# Altium PCB STM32F4_OSD_V12.PcbDoc
Units mil, origin at the board's own origin, x right, y up, seen from the top; angles counter-clockwise.
Board outline 6000 x 4000 mil, 4 copper layers (Top Layer, Top power, Top GND, Bottom Layer), stack 30.634 mil thick; 61 components, 66 nets, 277 pads, 85 vias.
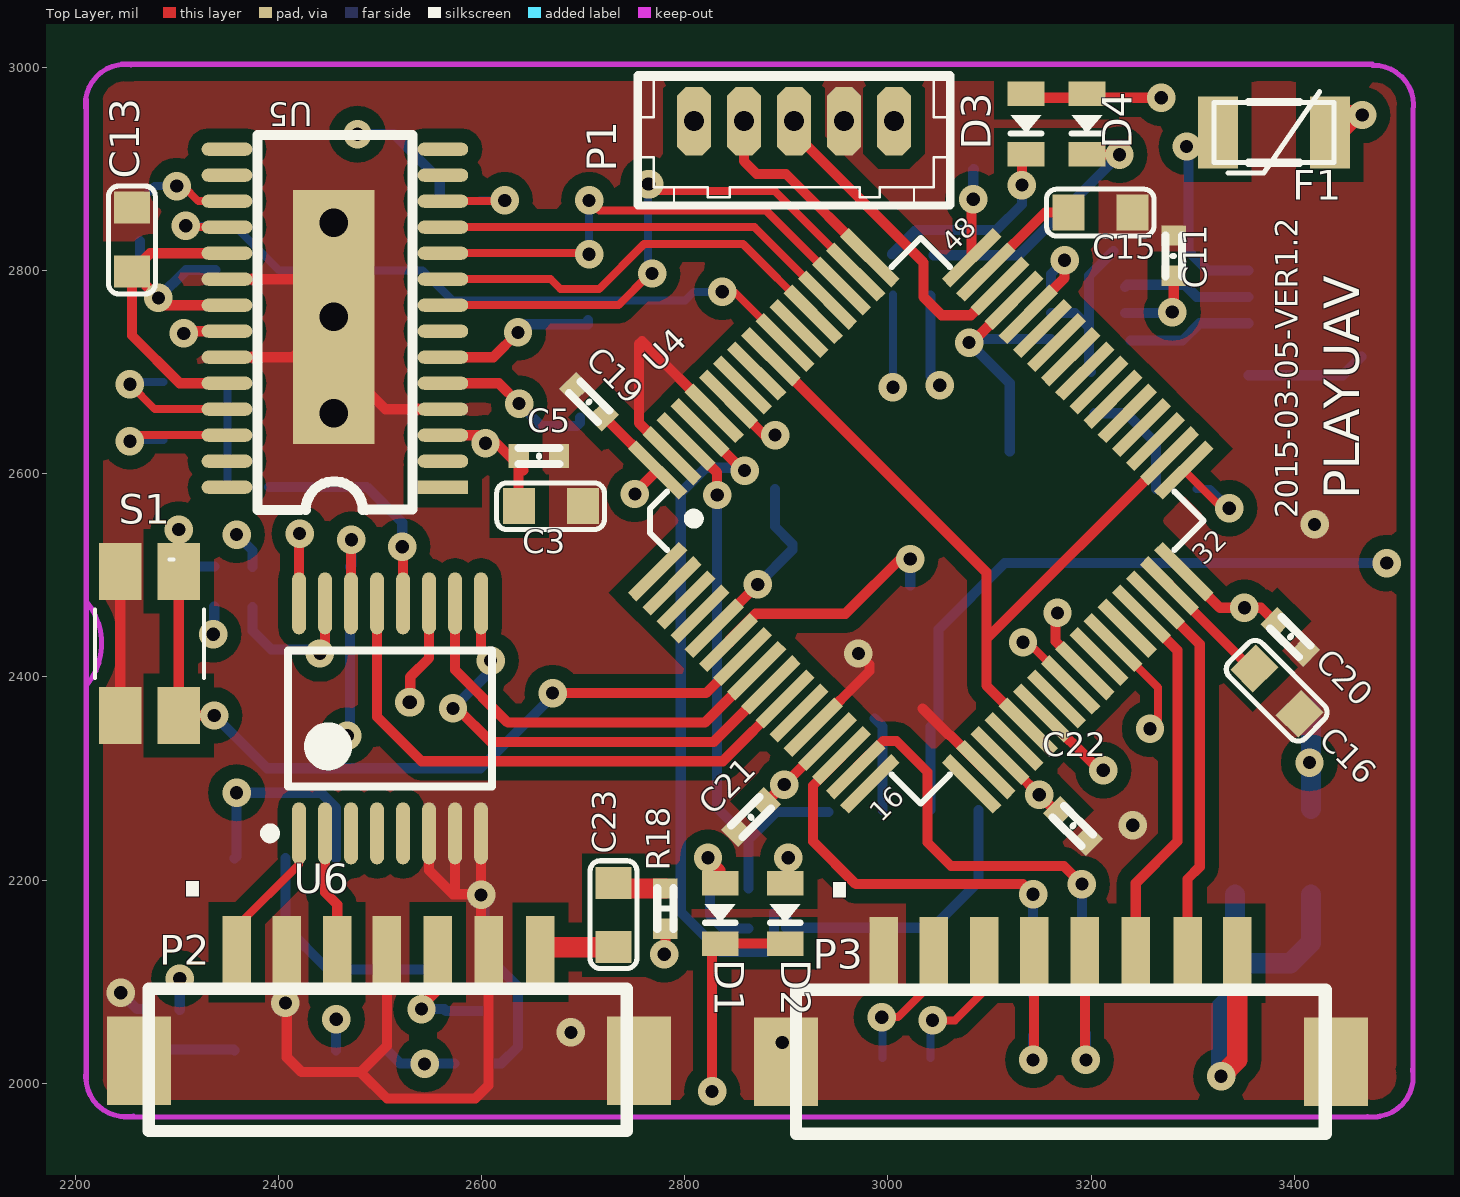
[diagram p0: Top Layer view]
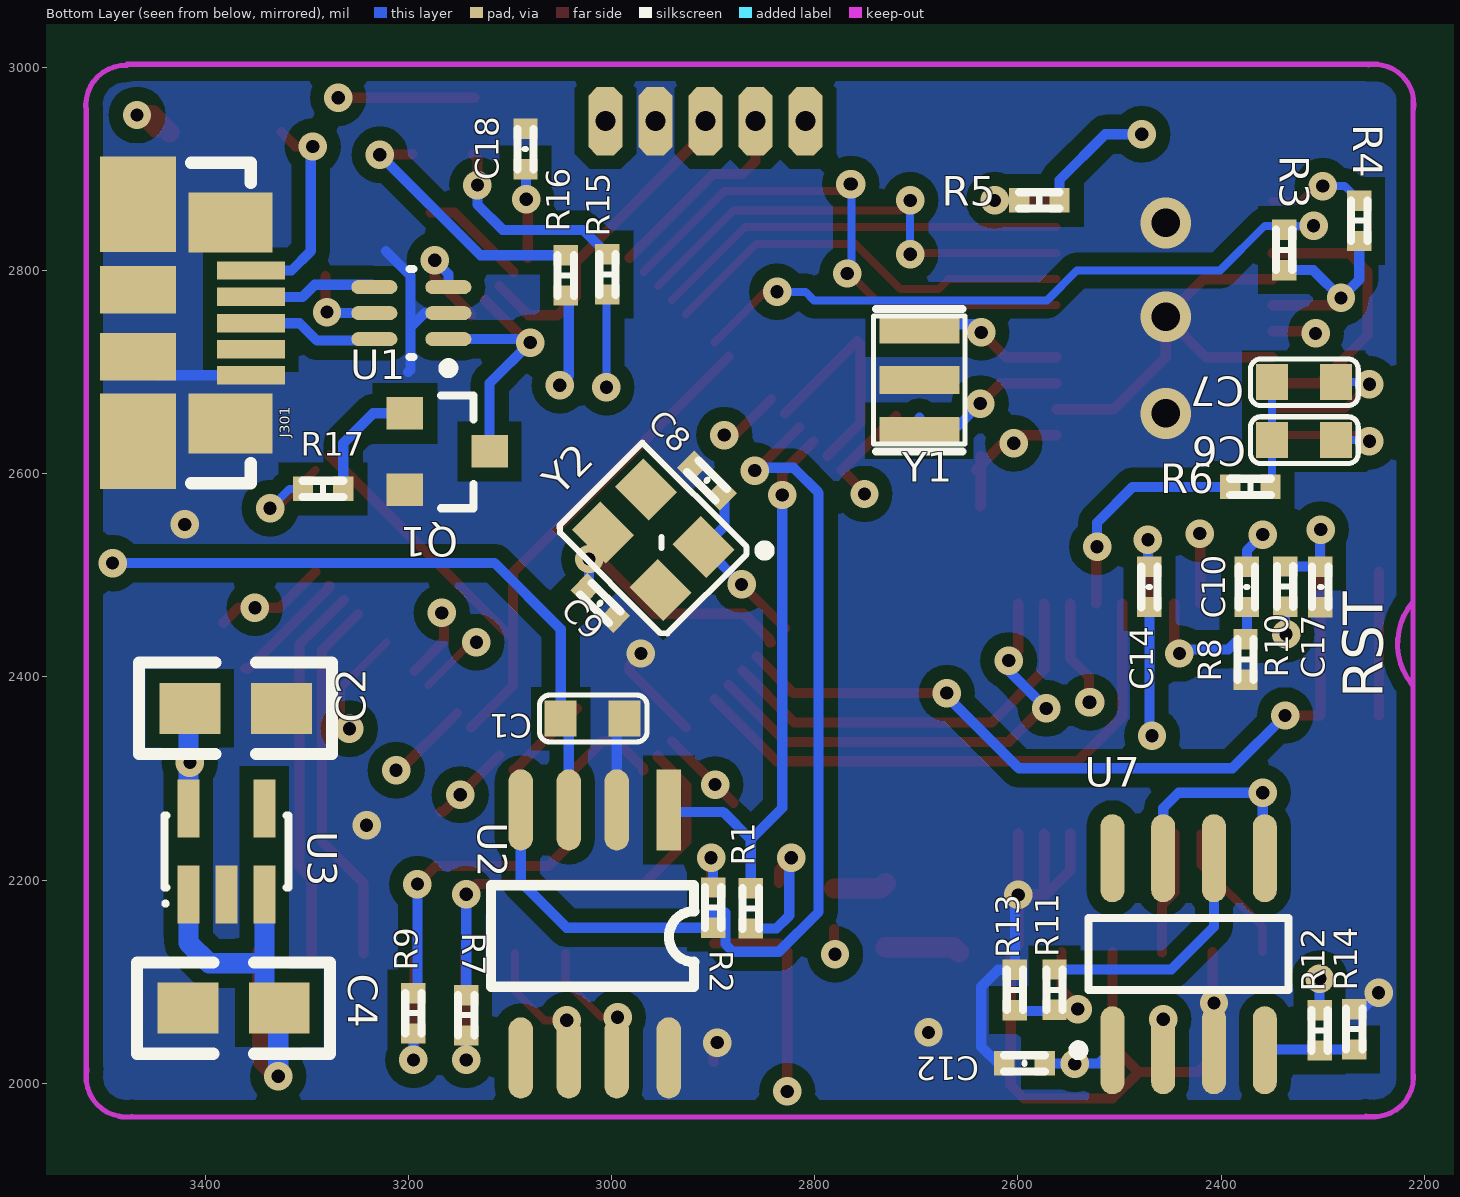
[diagram p1: Bottom Layer view, seen from below]
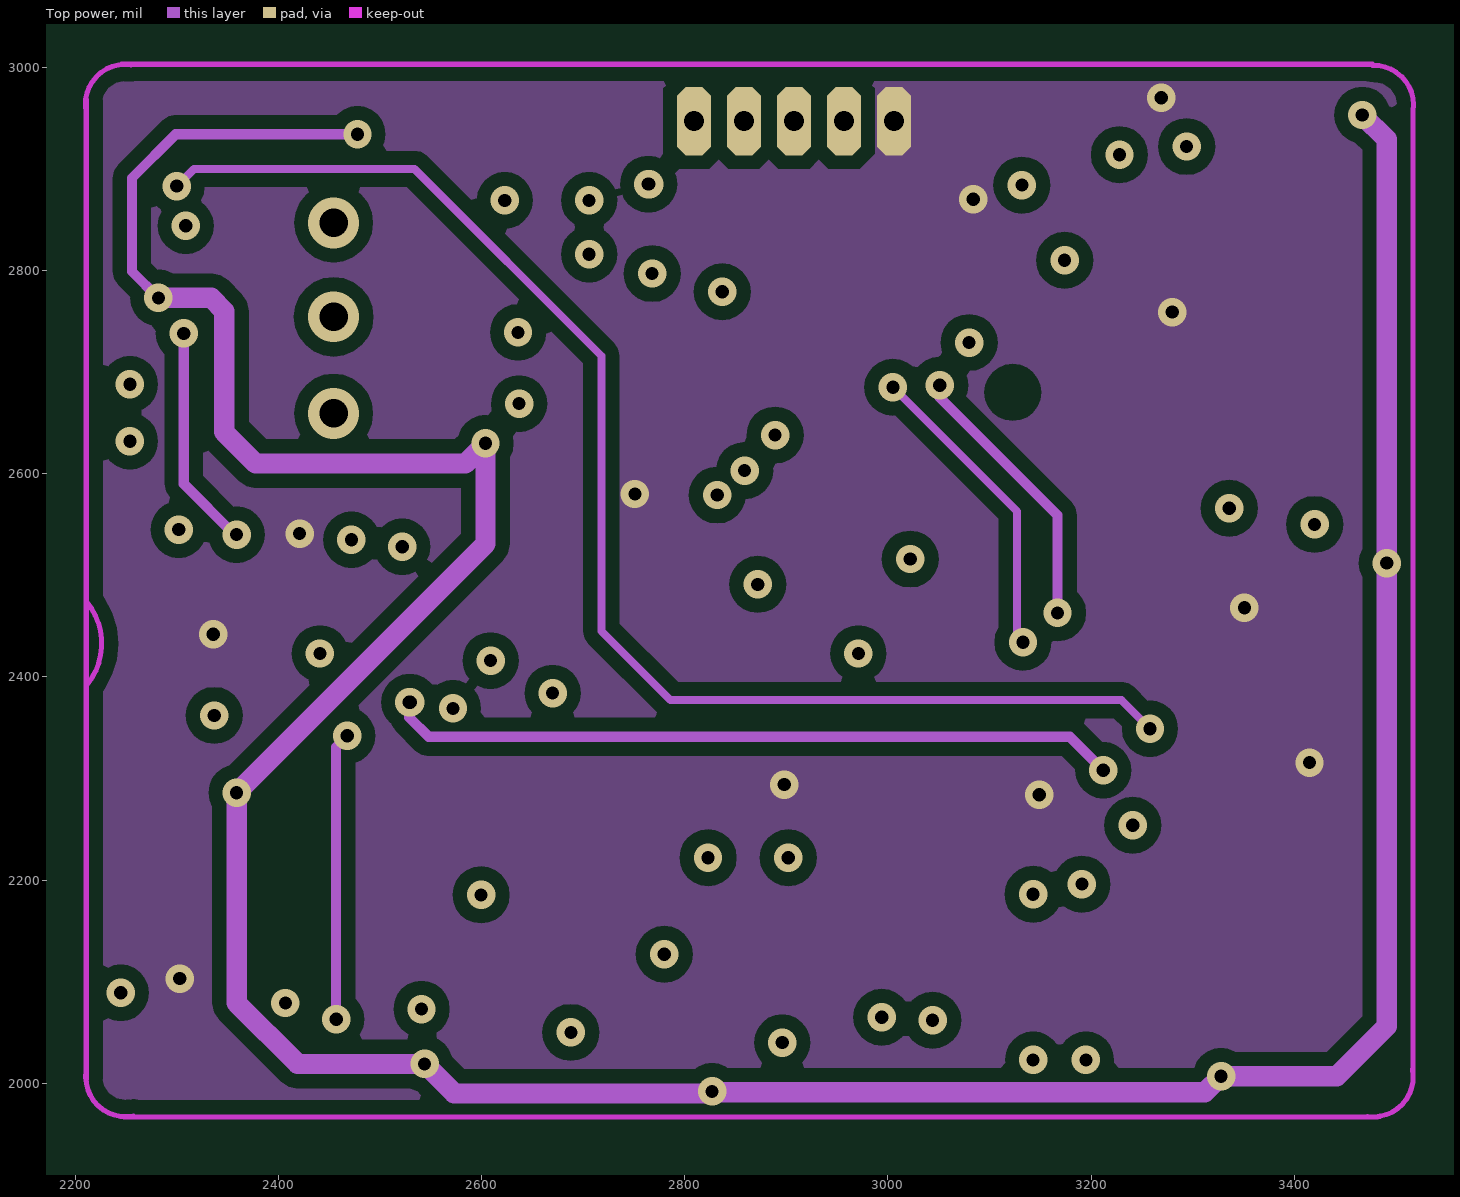
[diagram p2: Top power]
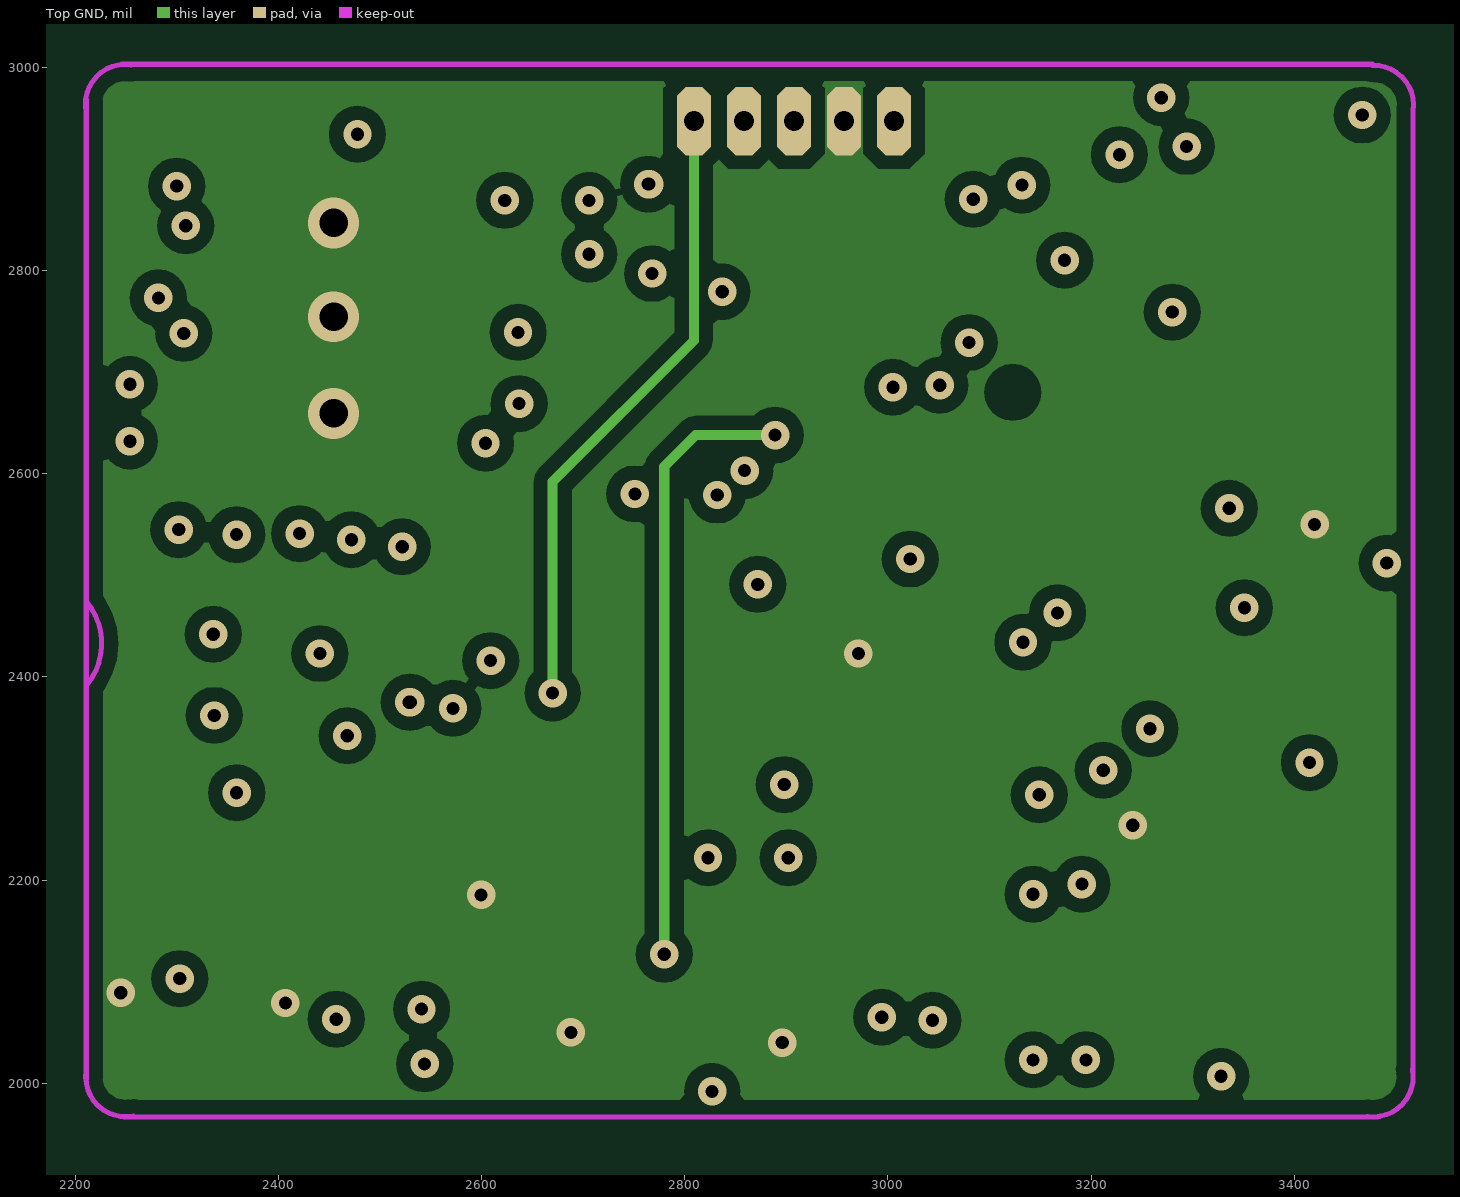
[diagram p3: Top GND]

## Layer stack, top to bottom
Top Solder: solder mask 0.4, Solder Resist, Dk 3.5
Top Layer: signal copper 1.4
Dielectric1: core 10, FR-4, Dk 4.2
Top power: signal copper 1.417
Dielectric 3: prepreg 5, Dk 4.2
Top GND: signal copper 1.417
Dielectric 2: core 10, Dk 4.2
Bottom Layer: signal copper 1.4
Bottom Solder: solder mask 0.4, Solder Resist, Dk 3.5

## Board outline
1000,1000 7000,1000 7000,5000 1000,5000

## Design rules (kind name [scope] priority, off if disabled: settings)
Clearance inpoly [(InPoly)] p1: gap=13.78
Clearance [All] p2: gap=7.87
ComponentClearance [All] p1: gap=0 collisioncheckmode=3 verticalgap=0 showdistances=FALSE
FabricationTestpoint [(IsPad And (OnTopLayer Or OnBottomLayer))] p1: side=3 testpointundercomponent=TRUE minsize=40 maxsize=100 preferedsize=60 minholesize=0 maxholesize=40 preferedholesize=32 testpointgrid=1 allowsidetop=TRUE allowsidebottom=TRUE usegrid=TRUE gridtolerance=0.01
PlaneConnect [All] p1: planeconnectstyle=Direct reliefexpansion=20 reliefentries=4 reliefconductorwidth=10 reliefairgap=10
PolygonConnect [All] p1: connectstyle=Direct reliefconductorwidth=10 reliefentries=4 polygonreliefangle="90 Angle" airgapwidth=10
RoutingVias [All] p1: holewidth=13 width=28 viastyle="Through Hole" minholewidth=13 minwidth=28 maxholewidth=13 maxwidth=28
SolderMaskExpansion [All] p1: expansion=4
Width [All] p1: maxlimit=78.74 minlimit=5.91 preferedwidth=10
27 further rules are at their usual default settings.

## Components (designator, comment, footprint, x,y, rotation, side; value= is the part's Value field where it differs from the comment)
C1 "104" 0603C 3017,2359 r180 bottom
C2 "10uf" 0805 3325,2369 r0 bottom
C3 "10uf" 0603C 2667,2568 r180 top
C4 "10uf" 0805 3417,2074 r180 bottom
C5 "Cap" 0402-CAP 2655,2619 r0 top
C6 "4.7uF" 0603C 2317,2633 r180 bottom
C7 "4.7uF" 0603C 2317,2690 r180 bottom
C8 "8pF" 0402-CAP 2906,2591 r45 bottom
C9 "8pF" 0402-CAP 3011,2475 r225 bottom
C10 "104" 0402-CAP 2373,2490 r270 bottom
C11 "Cap" 0402-CAP 3283,2816 r270 top
C12 "104" 0402-CAP 2592,2018 r0 bottom
C13 "1uf" 0603C 2256,2829 r270 top
C14 "104" 0402-CAP 2469,2490 r270 bottom
C15 "2.2uf" 0603C 3208,2857 r180 top
C16 "2.2uf" 0603C 3382,2387 r135 top
C17 "Cap" 0402-CAP 2304,2487 r90 bottom
C18 "104" 0402-CAP 3083,2921 r270 bottom
C19 "104" 0402-CAP 2706,2673 r315 top
C20 "104" 0402-CAP 3396,2437 r135 top
C21 "104" 0402-CAP 2863,2262 r45 top
C22 "104" 0402-CAP 3182,2251 r135 top
C23 "2.2uf" 0603C 2730,2167 r90 top
D1 "LED" 0603-LED 2835,2167 r90 top
D2 "LED" 0603-LED 2899,2167 r90 top
D3 "LED" 0603-LED 3136,2944 r90 top
D4 "LED" 0603-LED 3196,2944 r90 top
F1 "500MA" PTC-1206 3380,2936 r180 top
J301 "MICRO USB B" MOLEX-47346-0001 3466,2748 r180 bottom
P1 "JTAG" DF13-5P-1.25DSA 2907.58,2947 r180 top
P2 "DF13-7P-1.25DSA" DF13C-7P-1.25V 2593,2033 r0 top locked
P3 "DF13-8P-1.25DSA" DF13C-8P-1.25V 3210,2097 r0 top locked
Q1 "Comment" SOT23-3 3164,2622 r270 bottom
R1 "1K" 0402-RES 2863,2177 r90 bottom
R2 "1K" 0402-RES 2900,2168 r270 bottom
R3 "1K" 0402-RES 2338,2815.32 r270 bottom
R4 "1K" 0402-RES 2264,2844 r270 bottom
R5 "1K" 0402-RES 2574,2869 r180 bottom
R6 "75R" 0402-RES 2376,2587 r0 bottom
R7 "220R" 0402-RES 3143,2062 r270 bottom
R8 "75R" 0402-RES 2376,2422 r90 bottom
R9 "220R" 0402-RES 3195,2064 r270 bottom
R10 "10K" 0402-RES 2337,2484 r270 bottom
R11 "75R" 0402-RES 2564,2097 r90 bottom
R12 "3K" 0402-RES 2303,2057 r90 bottom
R13 "75R" 0402-RES 2603,2087 r270 bottom
R14 "1.5K" 0402-RES 2269,2048.32 r270 bottom
R15 "1K" 0402-RES 3004,2801 r90 bottom
R16 "1K" 0402-RES 3045,2800 r90 bottom
R17 "1K" 0402-RES 3279,2585 r180 bottom (schematic designator R15)
R18 "75R" 0402-RES 2781,2167 r270 top
S1 "TAC_SWITCHSMD" EVQP7J01K 2273,2433 r270 top
U1 "NUF2221W1T2" SOT363 3197,2758 r0 bottom
U2 "82C250T" SO-8N 2943.57,2249.32 r270 bottom
U3 "SPX3819-3.3V" SOT23-5 3378,2223 r180 bottom
U4 "STM32F405RG" LQFP64 2771.48,2501.32 r45 top
U5 "MAX7456EUI" SSOP-28 2562,2586.68 r180 top
U6 "ADG733" TSOP16 2420.46,2246 r180 top
U7 "MAX7452" SOIC-SN8_N 2432,2127 r90 bottom
Y1 "27MHZ" 27MHZ 2694.5,2694.5 r90 bottom
Y2 "8M" OSCILLATOR-3.2X2.5 2959,2535 r45 bottom

## Footprints (in the part's own frame and the unit in brackets; to place one, negate y for a bottom-side part, rotate by r counter-clockwise, add the part's x,y. Pads: shape width x height; smd on the part's side, far side on the other; paste and mask are expansions set on the pad)
27MHZ [mil]
  rect 27.56x78.74 smd: 1(-52.5,2.5) 2(47.5,2.5) 3(-2.5,2.5)
  silkscreen extent -73,-42 67,48
0402-CAP [mil] "0402-CAP"
  rect 20x24 smd: 1(-18.37,-1.6) 2(21.31,-1.6)
  silkscreen extent -18,-10 22,6
0402-RES [mil] "0402-RES"
  rect 20x24 smd: 1(-24.68,0) 2(15,0)
  silkscreen extent -25,-12 15,12
0603-LED [mil] "0603-LED"
  rect 24x36 smd: 1(30,0) 2(-29.53,0)
  silkscreen extent -9,-15 9,15
0603C [mm]
  rect 0.8x0.9 smd: 1(0.762,0) 2(-0.838,0)
  silkscreen extent -1.37,-0.58 1.32,0.58
0805 [mil]
  rect 60x50 smd: 1(0,0) 2(90,0)
  silkscreen extent -50,-45 140,45
DF13-5P-1.25DSA [mm]
  oct 0.856x1.711 hole 0.5: 1(-2.5,0) 2(-1.25,0) 3(0,0) 4(1.25,0) 5(2.5,0)
  silkscreen extent -3.97,-1.2 3.98,2.13
DF13C-7P-1.25V [mil]
  rect 28x71 smd: 1(-233.82,96) 2(-184.61,96) 3(-135,96) 4(-86,96) 5(-36,96) 6(14,96) 7(65,96)
  rect 63x87 smd: M$0(162,-10.87) M$1(-330.28,-10.87)
  silkscreen extent -320,-80 150,60
DF13C-8P-1.25V [mil]
  rect 28x71 smd: 1(-213.82,31) 2(-164.61,31) 3(-115,31) 4(-66,31) 5(-16,31) 6(34,31) 7(85,31) 8(134,31)
  rect 63x87 smd: M$0(231,-75.87) M$1(-310.28,-75.87)
  silkscreen extent -300,-147 221,-5
EVQP7J01K [mil] "EVQP7J01K"
  rect 56x42 smd: 1(-70.87,29) 2(71,29) 3(-70.87,-28.54) 4(71,-28.54)
  silkscreen extent -83,-53 34,54
LQFP64 [mm]
  rect 1.8x0.3 smd: 1(0.075,0.003) 2(0.075,-0.497) 3(0.075,-0.997) 4(0.075,-1.497) 5(0.075,-1.997) 6(0.075,-2.497) 7(0.075,-2.997) 8(0.075,-3.497) 9(0.075,-3.997) 10(0.075,-4.497) 11(0.075,-4.997) 12(0.075,-5.497) 13(0.075,-5.997) 14(0.075,-6.497) 15(0.075,-6.997) 16(0.075,-7.497) 33(11.175,-7.497) 34(11.175,-6.997) 35(11.175,-6.497) 36(11.175,-5.997) 37(11.175,-5.497) 38(11.175,-4.997) 39(11.175,-4.497) 40(11.175,-3.997) 41(11.175,-3.497) 42(11.175,-2.997) 43(11.175,-2.497) 44(11.175,-1.997) 45(11.175,-1.497) 46(11.175,-0.997) 47(11.175,-0.497) 48(11.175,0.003)
  rect 0.3x1.8 smd: 17(1.875,-9.297) 18(2.375,-9.297) 19(2.875,-9.297) 20(3.375,-9.297) 21(3.875,-9.297) 22(4.375,-9.297) 23(4.875,-9.297) 24(5.375,-9.297) 25(5.875,-9.297) 26(6.375,-9.297) 27(6.875,-9.297) 28(7.375,-9.297) 29(7.875,-9.297) 30(8.375,-9.297) 31(8.875,-9.297) 32(9.375,-9.297) 49(9.375,1.803) 50(8.875,1.803) 51(8.375,1.803) 52(7.875,1.803) 53(7.375,1.803) 54(6.875,1.803) 55(6.375,1.803) 56(5.875,1.803) 57(5.375,1.803) 58(4.875,1.803) 59(4.375,1.803) 60(3.875,1.803) 61(3.375,1.803) 62(2.875,1.803) 63(2.375,1.803) 64(1.875,1.803)
  silkscreen extent 0.63,-8.75 10.63,1.25
MOLEX-47346-0001 [mil] "MOLEX-47346-0001"
  rect 67x18 smd: D+(111,0) D-(111,26) GND(111,-51.18) ID(111,-25.59) VBUS(111,52)
  rect 75x94 smd: GND1(0,117) GND4(0,-116.14)
  rect 83x59 smd: GND2(91,99) GND3(91,-98.43)
  rect 75x47 smd: GND5(0,-32.97) GND6(0,33)
  silkscreen extent 52,-157 111,158
OSCILLATOR-3.2X2.5 [mil] "OSCILLATOR-3.2X2.5"
  rect 47.24x39.37 smd: 1(-40,-30) 2(40,30) 3(40,-30) 4(-40,30)
  silkscreen extent -89,-74 75,60
PTC-1206 [mm]
  rect 1x1.8 smd: 1(-1.4,0) 2(1.4,0)
  silkscreen extent -1.5,-1.02 1.5,1.02
SO-8N [mil]
  rect 80x24 smd: 1(-19.68,0)
  oval 80x24 smd: 2(-19.68,-51.18) 3(-19.68,-98.43) 4(-19.68,-145.67) 5(224.41,-145.67) 6(224.41,-98.43) 7(224.41,-51.18) 8(224.41,0)
  silkscreen extent 54,-175 154,25
SOIC-SN8_N [mm] "SOIC, 8-Leads, Body 4.9x3.8mm, Pitch 1.27mm, IPC Medium Density"
  oval 2.2x0.6 smd: 1(-2.4,1.905) 2(-2.4,0.635) 3(-2.4,-0.635) 4(-2.4,-1.905) 5(2.4,-1.905) 6(2.4,-0.635) 7(2.4,0.635) 8(2.4,1.905)
  silkscreen extent -2.52,-2.5 0.9,2.88, body extent -2,-2.5 2,2.5, height 1.75
SOT23-3 [mil] "SOT23-3"
  rect 32x36 smd: 1(-37.4,-39.37) 2(38,-39.37) 3(0,44)
  silkscreen extent -55,-4 56,28
SOT23-5 [mm]
  rect 0.55x1.45 smd: 1(-0.975,-0.948) 2(-0.025,-0.948) 3(0.925,-0.948) 4(0.925,1.202) 5(-0.975,1.202)
  silkscreen extent -1.6,-1.22 1.52,1.03
SOT363 [mm]
  oval 1.15x0.35 smd: 1(-0.925,0.65) 2(-0.925,0) 3(-0.925,-0.65) 4(0.925,-0.65) 5(0.925,0) 6(0.925,0.65)
  silkscreen extent -1.05,-1.1 0.05,1.5, body extent -0.7,-1.1 0.7,1.1, height 1.1
SSOP-28 [mm]
  rect 1.27x0.33 smd: 1(0,0)
  oval 1.27x0.33 smd: 2(0,-0.65) 3(0,-1.3) 4(0,-1.95) 5(0,-2.6) 6(0,-3.25) 7(0,-3.9) 8(0,-4.55) 9(0,-5.2) 10(0,-5.85) 11(0,-6.5) 12(0,-7.15) 13(0,-7.8) 14(0,-8.45) 15(5.398,-8.45) 16(5.397,-7.8) 17(5.397,-7.15) 18(5.397,-6.5) 19(5.397,-5.85) 20(5.397,-5.2) 21(5.397,-4.55) 22(5.397,-3.9) 23(5.397,-3.25) 24(5.397,-2.6) 25(5.397,-1.95) 26(5.397,-1.3) 27(5.397,-0.65) 28(5.397,0)
  rect 2.032x6.35 smd: 4(2.731,-4.259)
  silkscreen extent 0.76,-8.81 4.64,0.57
TSOP16 [mm]
  oval 0.35x1.55 smd: 1(0,0) 2(-0.65,0) 3(-1.3,0) 4(-1.95,0) 5(-2.6,0) 6(-3.25,0) 7(-3.9,0) 8(-4.55,0) 9(-4.55,-5.75) 10(-3.9,-5.75) 11(-3.25,-5.75) 12(-2.6,-5.75) 13(-1.95,-5.75) 14(-1.3,-5.75) 15(-0.65,-5.75) 16(0,-5.75)
  silkscreen extent -4.83,-4.58 0.85,0.12, body extent -4.83,-5.12 0.27,-0.63, height 1.2

## Part data
C1 C10: library part CAP, "Capacitor"
C2 C4: library part E
C3 C13 C15 C16 C23: library part "Cap Pol1", "Polarized Capacitor (Radial)"
C5 C11 C17: "Capacitor"
C6 C7: library part ELECTRO1, "Electrolytic Capacitor 1"
C8 C9: library part CAP0805, "Capacitor"
C12 C14 C18 C19 C20 C21 C22: library part Cap, "Capacitor"
F1 R1 R2: library part RES
J301: library part MOLEX-47346-0001
P1: library part "Header 5", "Header, 5-Pin"
P2: library part "Header 7", "Header, 7-Pin"
P3: library part "Header 8", "Header, 8-Pin"
R3 R4 R5 R6 R7 R8 R9 R10 R12 R14 R15 R16 R17 R18: library part Res2, "Resistor"
R11 R13: library part Res1, "Resistor"
U2: library part SN65HVD230D
U3: library part SP6
U5: library part MAX7456
Y1: library part 晶振3脚
Y2: library part ZQ_KX12B, "7B-8.000MAAJ-T"

## Via types
v1: diameter 28, hole 13, Top Layer to Bottom Layer, 82 vias
v2: diameter 50, hole 28, Top Layer to Bottom Layer, 3 vias

## Nets (pads, with @x,y where several pads share a name; then routed paths per layer and width w, separated by ;. In a path a pad name is that pad's centre, name@x,y a point inside that pad or via, vN(x,y) a via of type N, cw(c..) or ccw(c..) an arc to the next point about the centre after c; other vN are vias at no path point)
+3.3V: C2.2 C11.2 C18.2 C19.2 C20.2 C21.2 C22.2 D3.1 D4.1 P1.1 R10.2 R12.2 U1.5 U3.5 U4.13 U4.19 U4.32 U4.48 U4.64 U6.16 | length 920.3
  Top Layer w10: U6.16 2420.46,2540.46 v1(2421,2541) ; C19.2 2773,2603.74 U4.64 2751,2581.25 v1(2751,2580) ; C21.2@2879.97,2275.94 v1(2898.03,2294) U4.13 ; U4.48 3082.49,2868.49 v1(3084,2870) ; U4.19 3165.7,2267.2 C22.2 ; D3.1@3135,2970 3196,2970 v1(3269,2970) ; v1(3280,2759) 3281.4,2760.4 C11.2 ; U4.32 3326.8,2468 v1(3351,2468) 3367.26,2468 C20.2
  Bottom Layer w10: R12.2 v1(2303,2103) ; v1(2336,2442) 2337,2443 R10.2 ; v1(3084,2870) 3084,2899.09 C18.2 ; U1.5 3279,2758 v1(3280,2759)
  Bottom Layer w20: v1(3415,2315.6) v1@3416.4,2317 ; C2.2 3416.4,2367.6 v1@3416.4,2317 ; U3.5 v1@3416.4,2317
  other v1: 3148.95,2283.95
+5V: C1.2 C3.1 C4.2 C5.1 C12.1 C13.1 D1.2 D2.2 F1.1 P3.8 R3.2 R4.2 R5.2 U2.3 U3.1 U3.3 U5.3 U5.19 U5.21 U5.24 U7.1 U7.5 U7.7 | length 6044.2
  Top Layer w10: U5.24 2302.95,2689.05 2256,2736 C13.1 ; U5.21 2289.18,2765.82 v1(2282,2773) C13.1 ; U5.19 2274,2817 C13.1 ; U5.3 2596.13,2637.87 v1(2604,2630) 2614.77,2630 C5.1@2636.63,2608.14 ; C5.1 C5.1@2636.63,2608.14 ; C3.1 2636.63,2568.37 C5.1@2636.63,2608.14 ; 2641.4,2603.37 C5.1@2636.63,2608.14 ; v1(2827,1992) 2827,2129.47 D1.2 D2.2 ; F1.1 3450,2936 v1(3467,2953)
  Top Layer w20: v1(3328,2007) 3344,2023 P3.8 ; F1.1 3452.12,2953 v1(3467,2953)
  Top power w10: v1(2282,2773) 2256,2799 2256,2891 2299,2934 v1(2478,2934)
  Top power w20: v1(2282,2773) 2334,2773 2347,2760 2347,2641 2378,2610 2584,2610 v1(2604,2630) 2604,2531 v1(2359,2286) 2359,2079 2419,2019 v1(2544,2019) 2573,1990 2825,1990 v1(2827,1992) 2827.87,1991.13 3312.13,1991.13 v1(3328,2007) 3442,2007 3491,2056 v1(3491,2512) 3491,2929 v1(3467,2953)
  Bottom Layer w10: R4.2 2264,2791 v1(2282,2773) 2309.32,2800.32 R3.2 ; U7.5 2359,2223.49 v1(2359,2286) 2442,2286 2457,2271 U7.7 ; v1(2478,2934) 2514,2934 2559,2889 R5.2 ; U7.1 2519.91,2019.6 v1@2544,2019.6 ; v1(2544,2019) v1@2544,2019.6 ; C12.1 v1@2544,2019.6 ; U2.3 3042,2351.01 C1.2 3049.99,2411.99 3050,2447 3115,2512 v1(3491,2512)
  Bottom Layer w20: v1(3328,2007) 3328,2075 3341.6,2088.6 3341.6,2118 ; U3.3 3341.6,2118 ; U3.1 3416.4,2138.4 3396,2118 3341.6,2118
AUDIO: R18.2 U4.59 | length 687.8
  Top Layer w10: v1(2780,2127) 2781,2128 R18.2 ; U4.59 2878.41,2638 v1(2889,2638)
  Top GND w10: v1(2780,2127) 2780,2607 2811,2638 v1(2889,2638)
AUDIO_OUT: C23.2 P2.7 | length 74.1
  Top Layer w20: P2.7 2663.01,2134.01 C23.2
CAN+: P3.2 U2.7 | length 134.1
  Top Layer w7.87: v1(2994,2065) 3010,2065 3045.39,2100.39 P3.2
  Bottom Layer w7.87: v1(2994,2065) 2994.76,2064.24 U2.7
CAN-: P3.3 U2.6 | length 141.9
  Top Layer w7.87: v1(3044,2062) 3066,2062 3095,2091 P3.3
  Bottom Layer w7.87: U2.6 3042,2064 v1(3044,2062)
CAN_RX: R2.2 U2.4 U4.61 | length 997.4
  Top Layer w10: U4.61 2858.74,2602 2859,2602.26 v1(2859,2603)
  Bottom Layer w10: v1(2859,2603) 2856.13,2605.87 2820.87,2605.87 2796.13,2581.13 2796.13,2168.6 2835.28,2129.44 2880.33,2129.44 2887.87,2136.98 2887.87,2168 2900,2168 R2.2 3044,2153 3089.24,2198.24 U2.4
CAN_TX: R1.2 U2.1 U4.62 | length 555.1
  Top Layer w10: U4.62 2832,2600.9 v1(2832,2579)
  Bottom Layer w10: v1(2832,2579) 2832,2271 2863,2240 ; R1.2 2863,2240 ; U2.1@2941.7,2267.13 2890.13,2267.13 2863,2240
CLKIN: U5.5 Y1.1 | length 158.7
  Top Layer w10: U5.5 2616.95,2689.05 v1(2637,2669)
  Bottom Layer w10: v1(2637,2669) 2659,2647 2694,2647 2697,2650 Y1.1@2697,2655
D+: J301.D+ U1.6 | length 123
  Bottom Layer w10: U1.6@3239,2731 3290.01,2731 3307.01,2748 J301.D+
D-: J301.D- U1.4 | length 127.4
  Bottom Layer w10: U1.4 3235.7,2785.87 3292.13,2785.87 3304,2774 J301.D-
GND: C1.1 C2.1 C3.2 C4.1 C5.2 C8.2 C9.2 C11.1 C12.2 C13.2 C15.2 C16.2 C17.1 C18.1 C19.1 C20.1 C21.1 C22.1 J301.GND J301.GND1 J301.GND2 J301.GND3 J301.GND4 J301.GND5 J301.GND6 P1.2 P2.2 P2.4 P2.6 P2.M$0 P2.M$1 P3.1 P3.M$0 P3.M$1 Q1.2 R8.1 R13.1 R14.1 S1.3 S1.4 U1.2 U2.2 U2.8 U3.2 U4.12 U4.18 U4.60 U4.63 U5.4 U5.20 U5.23 U6.6 U6.7 U6.8 U7.3 Y1.3 | length 2451.9
  Top Layer w10: S1.4 S1.3 ; U5.23 2414.78,2714.64 v2(2454.5,2754.36) ; U5.20 2417.45,2791.41 v2(2454.5,2754.36) ; P2.2 2408.39,2025.61 2423,2011 2481,2011 ; P2.4 2507,2037 2481,2011 ; U6.6 2548.41,2209.59 2572,2186 ; U5.4@2562,2663.46 2505.54,2663.46 2454.5,2714.5 v2(2454.5,2754.36) ; U6.7 2574,2188 2572,2186 ; v1(2599.59,2185.41) U6.8 ; U4.63 2754.99,2650.07 2754.99,2727.56 2758,2730.58 U4.60 ; v1(2896,2040) 2899.72,2036.28 P3.M$1 ; U4.12 2982,2405.81 2982,2412 ; 3034,2369 3060.59,2342.41 3061.36,2342.41 3095.13,2308.64 U4.18 ; v1(3241,2254) v1@3241,2255 ; 2481,2011 2507,1985 2594,1985 2607,1998 P2.6 2599.59,2136.41 2599.59,2180 2593.59,2186 2572,2186
  Bottom Layer w10: v1(2245,2089) 2261,2073 R14.1 ; v1(2599.59,2185.41) 2603,2182 R13.1 2619.31,2111.69 2636,2095 2636,2036 2619.6,2019.6 C12.2 ; C1.1 2994.76,2351.24 U2.2 ; U1.2 3184,2758 3197.91,2744.09 ; 3200,2700 3197.91,2702.09 3197.91,2744.09 ; 3222,2819 3197.91,2794.91 3197.91,2744.09 ; J301.GND 3447.79,2696.82 J301.GND5
  other v1: 2688,2050 2407,2079 2971,2423 3420,2550
  other v2: 2454.5,2659.36 2454.5,2846.86
HSYNC: R3.1 U4.55 U5.18 | length 685.4
  Top Layer w7.87: v1(2309,2844) 2310.41,2842.59 U5.18 ; v1(2837,2779) 2848.77,2779 U4.55
  Bottom Layer w7.87: v1(2309,2844) 2357,2844 2401,2800 2542,2800 2571.41,2770.59 2800.59,2770.59 2809,2779 v1(2837,2779)
LED1: R15.1 U4.24 | length 459.6
  Top Layer w7.87: v1(3133,2434) 3138.09,2434 U4.24
  Top power w7.87: v1(3005,2685) 3127,2563 3127,2440 v1(3133,2434)
  Bottom Layer w7.87: v1(3005,2685) R15.1@3005,2776.31
LED2: R16.1 U4.25 | length 433.8
  Top Layer w10: v1(3167,2463) 3165,2461 3165,2434.93 U4.25
  Top power w10: v1(3051,2687) 3051,2675 3167,2559 v1(3167,2463)
  Bottom Layer w10: R16.1@3042,2775.31 3042,2696 v1(3051,2687)
LEVEL: U4.10 U6.13 | length 556.6
  Top Layer w10: U6.13 2497.23,2360.77 2541,2317 2837.52,2317 U4.10
LOS: R5.1 U5.12 | length 85.7
  Top Layer w7.87: U5.12 2622.18,2868.18 v1(2623,2869)
  Bottom Layer w7.87: R5.1 v1(2623,2869)
MASK: U4.22 U6.11 | length 908.8
  Top Layer w10: v1(2530,2375) 2530,2400 2548.41,2418.41 U6.11 ; U4.22 3208.41,2308 v1(3212,2308)
  Top power w10: v1(2529,2375) 2529,2360 2548,2341 3179,2341 v1(3212,2308)
  Bottom Layer w10: v1(2529,2375) v1(2530,2375)
NetC6_1: C6.1 U5.26 | length 131.3
  Top Layer w7.87: v1(2254,2632) 2259.87,2637.87 U5.26
  Bottom Layer w7.87: v1(2254,2632) 2255,2633 C6.1
NetC6_2: C6.2 C7.2 R6.1 | length 103.5
  Bottom Layer w7.87: C7.2 C6.2 2349.99,2588.32 R6.1
NetC7_1: C7.1 U5.25 | length 139.5
  Top Layer w7.87: v1(2254,2688) 2278.54,2663.46 U5.25
  Bottom Layer w7.87: v1(2254,2688) 2256,2690 C7.1
NetC8_1: C8.1 U4.5 Y2.1 | length 176
  Top Layer w10: U4.5 2829.16,2448.16 v1(2872,2491)
  Bottom Layer w10: v1(2872,2491) 2906.01,2525.01 2906.01,2530.86 2888.94,2547.92 C8.1@2888.94,2584.94
NetC9_1: C9.1 U4.6 Y2.2 | length 244.5
  Top Layer w10: U4.6 2844.36,2433.92 2844.36,2436.48 2869.99,2462.1 2958.1,2462.1 3017,2521 v1(3022,2516)
  Bottom Layer w10: v1(3022,2516) 3022,2490.12 C9.1@3022.06,2490.06
NetC10_1: C10.1 U5.22 | length 302.2
  Top Layer w10: v1(2307,2738) 2309.23,2740.23 U5.22
  Top power w10: v1(2307,2738) 2307,2590 2357,2540 v1(2359,2540)
  Bottom Layer w10: v1(2359,2540) 2374.6,2524.4 C10.1
NetC14_2: C14.2 U7.2 | length 457.5
  Top power w10: v1@2455,2061 2455,2056 2457,2058 v1(2457,2063) 2457,2331 v1(2468,2342)
  Top GND w10: v1@2455,2061 v1(2457,2063)
  Bottom Layer w10: U7.2 v1(2457,2063) ; v1(2468,2342) 2470.6,2344.6 C14.2
NetC16_1: C16.1 U4.31 | length 118.6
  Top Layer w10: U4.31 3278.65,2489.6 3278.65,2487.04 3357.47,2408.21 C16.1
NetC23_1: C23.1 R18.1 | length 53.2
  Top Layer w20: C23.1 2735.32,2191.68 R18.1
NetD1_1: D1.1 R1.1 | length 131.1
  Top Layer w10: v1(2823,2222) 2835,2210 D1.1
  Bottom Layer w10: v1(2823,2222) 2825,2220 2825,2165 2837.68,2152.32 R1.1
NetD2_1: D2.1 R2.1 | length 56.4
  Top Layer w10: D2.1 2902,2200 v1(2902,2222)
  Bottom Layer w10: R2.1 2900,2220 v1(2902,2222)
NetD3_2: D3.2 R15.2 | length 199.4
  Top Layer w10: v1(3132,2884) 3132,2910.47 D3.2
  Bottom Layer w10: R15.2 3028,2840 3107,2840 3132,2865 v1(3132,2884)
NetD4_2: D4.2 R16.2 | length 256.2
  Top Layer w10: D4.2 3196.47,2914 v1(3228,2914)
  Bottom Layer w10: R16.2 3129,2815 v1(3228,2914)
NetF1_2: F1.2 J301.VBUS | length 207.4
  Top Layer w10: v1(3294,2922) 3310.88,2922 F1.2
  Bottom Layer w10: v1(3294,2922) 3296,2920 3296,2819 3315,2800 J301.VBUS
NetR7_1: R7.1 U4.14 | length 433.7
  Top Layer w10: U4.14 2954.44,2321.28 2926.25,2293.1 2926.25,2238.25 2968.5,2196 3133,2196 v1(3143,2186)
  Bottom Layer w10: R7.1 v1(3143,2186)
NetR9_1: R9.1 U4.15 | length 444.3
  Top Layer w10: U4.15 2969,2308 2969,2310.57 2995.26,2336.83 3008.49,2336.83 3039,2306.32 3039,2237 3062.13,2213.87 3173.13,2213.87 v1(3191,2196)
  Bottom Layer w10: v1(3191,2196) 3191,2092.68 R9.1
NetR11_2: R11.2 U7.6 | length 241.9
  Bottom Layer w10: U7.6 2407,2154 2449,2112 R11.2
NetR12_1: R12.1 R14.2 U7.4 | length 88.3
  Bottom Layer w10: R14.2 2356.2,2033.32 U7.4
NRST: C17.2 P1.5 R10.1 S1.1 S1.2 U4.7 | length 1498.4
  Top Layer w10: v1(2302,2545) S1.1 S1.2 v1(2337,2362) ; v1(2670,2384) 2821,2384 U4.7
  Top GND w10: v1(2670,2384) 2670,2592 2809.15,2731.15 P1.5
  Bottom Layer w10: v1(2302,2545) 2302.77,2544.23 2302.77,2508.68 R10.1 ; v1(2337,2362) 2389,2310 2599,2310 2670,2381 v1(2670,2384)
PWM1: P3.4 R7.2 | length 129.4
  Top Layer w10: v1(3143,2023) 3144,2024 P3.4
  Bottom Layer w10: v1(3143,2023) R7.2
PWM2: P3.5 R9.2 | length 132
  Top Layer w10: P3.5 3194,2023 v1(3195,2023)
  Bottom Layer w10: v1(3195,2023) R9.2
PWM_SPISCLK: U4.21 U4.34 U4.56 | length 724.7
  Top Layer w10: U4.56 3097,2502.93 3097,2437.29 ; U4.21 3097,2391.58 3097,2437.29 ; U4.34 3097,2437.29
R17_2: Q1.1 R17.2 | length 117.8
  Bottom Layer w10: Q1.1 3234.6,2659.4 3264,2630 R17.2
RXD2: U4.17
RXD3: P3.7 U4.30 | length 370.7
  Top Layer w10: U4.30 3307,2432.12 3307,2213 3295,2201 P3.7
SPI3_CS: U4.50 U5.8 | length 548.7
  Top Layer w7.87: U5.8 2734.82,2765.82 2766,2797 v1(2768,2797) ; v1(2765,2885) 2771.81,2878.19 2888.77,2878.19 U4.50
  Top GND w7.87: v1(2764,2885) v1(2765,2885)
  Bottom Layer w7.87: v1(2764,2885) 2764,2801 v1(2768,2797)
SPI3_MISO: U4.52 U5.11 | length 408.3
  Top Layer w7.87: U5.11 2868.7,2842.59 U4.52
SPI3_MOSI: U4.53 U5.9 | length 415.7
  Top Layer w7.87: U5.9 2668.16,2791.41 2678,2781.57 2715.57,2781.57 2760,2826 2857.45,2826 U4.53
SPI3_SCK: U4.51 U5.10 | length 480.8
  Top Layer w7.87: U5.10 2705,2817 v1(2706,2816) ; v1(2706,2869) 2716,2859 2880.12,2859 U4.51
  Bottom Layer w7.87: v1(2706,2816) v1(2706,2869)
SPI_OE: R17.1 U4.33 | length 100.5
  Top Layer w7.87: U4.33 3329.02,2566 v1(3336,2566)
  Bottom Layer w7.87: R17.1 3317,2585 v1(3336,2566)
SWCLK: P1.4 U4.49 | length 202.7
  Top Layer w10: P1.4 2858.36,2907.64 2871,2895 2899.8,2895 U4.49
SWDIO: P1.3 U4.46 | length 320.5
  Top Layer w10: P1.3 2907.58,2935.42 3035,2808 3035,2774 3053,2756 3081.64,2756 U4.46
TXD2: U4.16
TXD3: P3.6 U4.29 | length 365.4
  Top Layer w10: P3.6 3244,2197 3285,2238 3285,2426.29 U4.29
USB_DM: U1.3 U4.44 | length 101.2
  Top Layer w10: U4.44@3138.17,2755.57 U4.44 3174,2792.68 v1(3174,2810)
  Bottom Layer w10: U1.3 3160.58,2796.58 v1(3174,2810)
USB_DP: Q1.3 U1.1 U4.45 | length 267.1
  Top Layer w10: v1(3080,2729) 3082.48,2729 U4.45
  Bottom Layer w10: Q1.3 3120,2689 v1(3080,2729) 3083.41,2732.41 U1.1
V_SW2: U4.8 U6.10 | length 405
  Top Layer w10: U6.10 2574,2407 2626,2355 2819.84,2355 U4.8
V_SW3: U4.9 U6.9 | length 472.4
  Top Layer w10: v1(2572,2369) 2576,2369 2609,2336 2828.68,2336 U4.9 ; U6.9 2599.59,2425.41 v1(2609,2416)
  Bottom Layer w10: v1(2572,2369) 2609,2406 v1(2609,2416)
VCAP2: C15.1 U4.47 | length 105.8
  Top Layer w10: U4.47 3154.81,2857 C15.1
VIDEO_IN: C10.2 R8.2 U6.15 | length 158.4
  Top Layer w10: v1(2441,2423) 2446.05,2428.05 U6.15
  Bottom Layer w10: C10.2 2374.6,2445.4 2393,2427 2445,2427 v1(2441,2423)
VIDEO_IN1: P2.3 U6.2 | length 122
  Top Layer w10: U6.2 2446.05,2187.95 2458,2176 P2.3
VIDEO_IN2: P2.1 U6.1 | length 142.4
  Top Layer w7.87: P2.1 2359.18,2154.18 2420.46,2215.46 U6.1
VIDEO_MIX: C14.1 U6.14 | length 90
  Top Layer w10: U6.14 2471.64,2534.64 v1(2472,2535)
  Bottom Layer w10: C14.1 2472,2509.77 v1(2472,2535)
VIDEO_O: R6.2 U6.12 | length 225.5
  Top Layer w10: v1(2522,2528) 2522.82,2527.18 U6.12
  Bottom Layer w10: R6.2 2487,2587 2522,2552 v1(2522,2528)
VIDEO_OUT: P2.5 R11.1 R13.2 | length 129.7
  Top Layer w10: v1(2541,2073) 2538,2073 2557,2092 P2.5
  Bottom Layer w10: v1(2541,2073) 2563.32,2073 R11.1 2565.32,2071 R13.2@2603,2071
VSYNC: R4.1 U4.27 U5.17 | length 1561.6
  Top Layer w7.87: v1(2300,2883) 2306.5,2883 2321.32,2868.18 U5.17 ; U4.27 3266,2389.61 3266,2355 3260,2349 v1(3258,2349)
  Top power w7.87: v1(2300,2883) 2317,2900 2534,2900 2718,2716 2718,2445 2786,2377 3230,2377 v1(3258,2349)
  Bottom Layer w7.87: R4.1 2278.32,2883 v1(2300,2883) v1@2303,2880
XFB: U5.6 Y1.2 | length 160.4
  Top Layer w10: U5.6 2611.64,2714.64 v1(2636,2739)
  Bottom Layer w10: v1(2636,2739) 2644,2747 2705,2747 Y1.2@2705,2751
XUSB: U4.42
pads on no net: J301.ID U2.5 U3.4 U4.1 U4.2 U4.3 U4.4 U4.11 U4.20 U4.23 U4.26 U4.28 U4.35 U4.36 U4.37 U4.38 U4.39 U4.40 U4.41 U4.43 U4.54 U4.57 U4.58 U5.1 U5.2 U5.7 U5.13 U5.14 U5.15 U5.16 U5.27 U5.28 U6.3 U6.4 U6.5 U7.8 Y2.3 Y2.4

## Polygon pours and split planes (outlines as drawn)
GND on Top Layer "Signal Layer 1-No Net" (solid, remove dead copper, pour order 12): 2211,3006 3513,3006 3519,3000 3519,1965 2215,1965 2213,1963 2209,1967 2209,3007
GND on Bottom Layer "Signal Layer 1-No Net" (solid, pour order 11): 2211,3003 3517,3003 3517,1965 2718,1965 2211,1965 2211,2472 2213,2474 2213,3002
GND on Bottom Layer "Top Layer-No Net" (solid, remove dead copper, pour order 9): 3835,3756.03 5141,3756.03 5141,1956.53 3835,1956.53 3835,3756.03
GND on Top GND "Signal Layer 1-No Net" (solid, remove dead copper, pour order 8): 2211,3006 2212,3007 3519,3007 3519,1967 3521,1965 2211,1965 2211,3004 2209,3006
+3.3V on Top power "Signal Layer 1-No Net" (solid, remove dead copper, pour order 10): 2211,3002 3515,3002 3515,1974 3508,1967 3504,1963 2211,1963 2211,3002 2213,3004

## Keep-outs
Keep-Out Layer:
  lines w5: 2211,2004 2211,2968 ; 2211,2012 ccw(c2249.56,2006.16) 2257.4,1967.95 ; 2211,2956 cw(c2249.2,2963.84) 2255.05,3002.4 ; 2211.1,2474.09 cw(c2162.26,2432.73) 2211.87,2392.29 ; 2246,3003 3477,3003 ; 2248,1967 3482,1967 ; 3472.16,1967.44 ccw(c3478,2006) 3516.2,2013.84 ; 3477.04,3001.82 cw(c3478.44,2962.84) 3517,2957 3517,2002

## Silkscreen, mask and mechanical layers (free items; w line width, h text height)
Top Overlay:
  text "PLAYUAV" at 3476,2575 h60 r90
  text "2015-03-05-VER1.2" at 3411,2556 h38 r90
Bottom Overlay:
  text "RST" at 2241,2379 h39.37 r270

## Dimensions
2210,2004 to 3516,2004 on Top Overlay
2248,1967 to 2246,3003 on Top Overlay

## Text inside footprints (layer, text, board x,y; h text height)
J301: Mechanical 4 ">VALUE" at 3454,2618.08 h20.4 r270
U4: Top Overlay "48" at 3064.4,2816.7 h19.68 r45; Top Overlay "32" at 3310.77,2509.08 h19.68 r45; Top Overlay "16" at 2993.41,2255.75 h19.68 r45